# Altium PCB lab2_sokolov_boost.PcbDoc
Units mm, origin at the board's own origin, x right, y up, seen from the top; angles counter-clockwise.
Board outline 38 x 23 mm, 2 copper layers (Top Layer, Bottom Layer), stack 1.57 mm thick; 20 components, 13 nets, 67 pads, 56 vias.
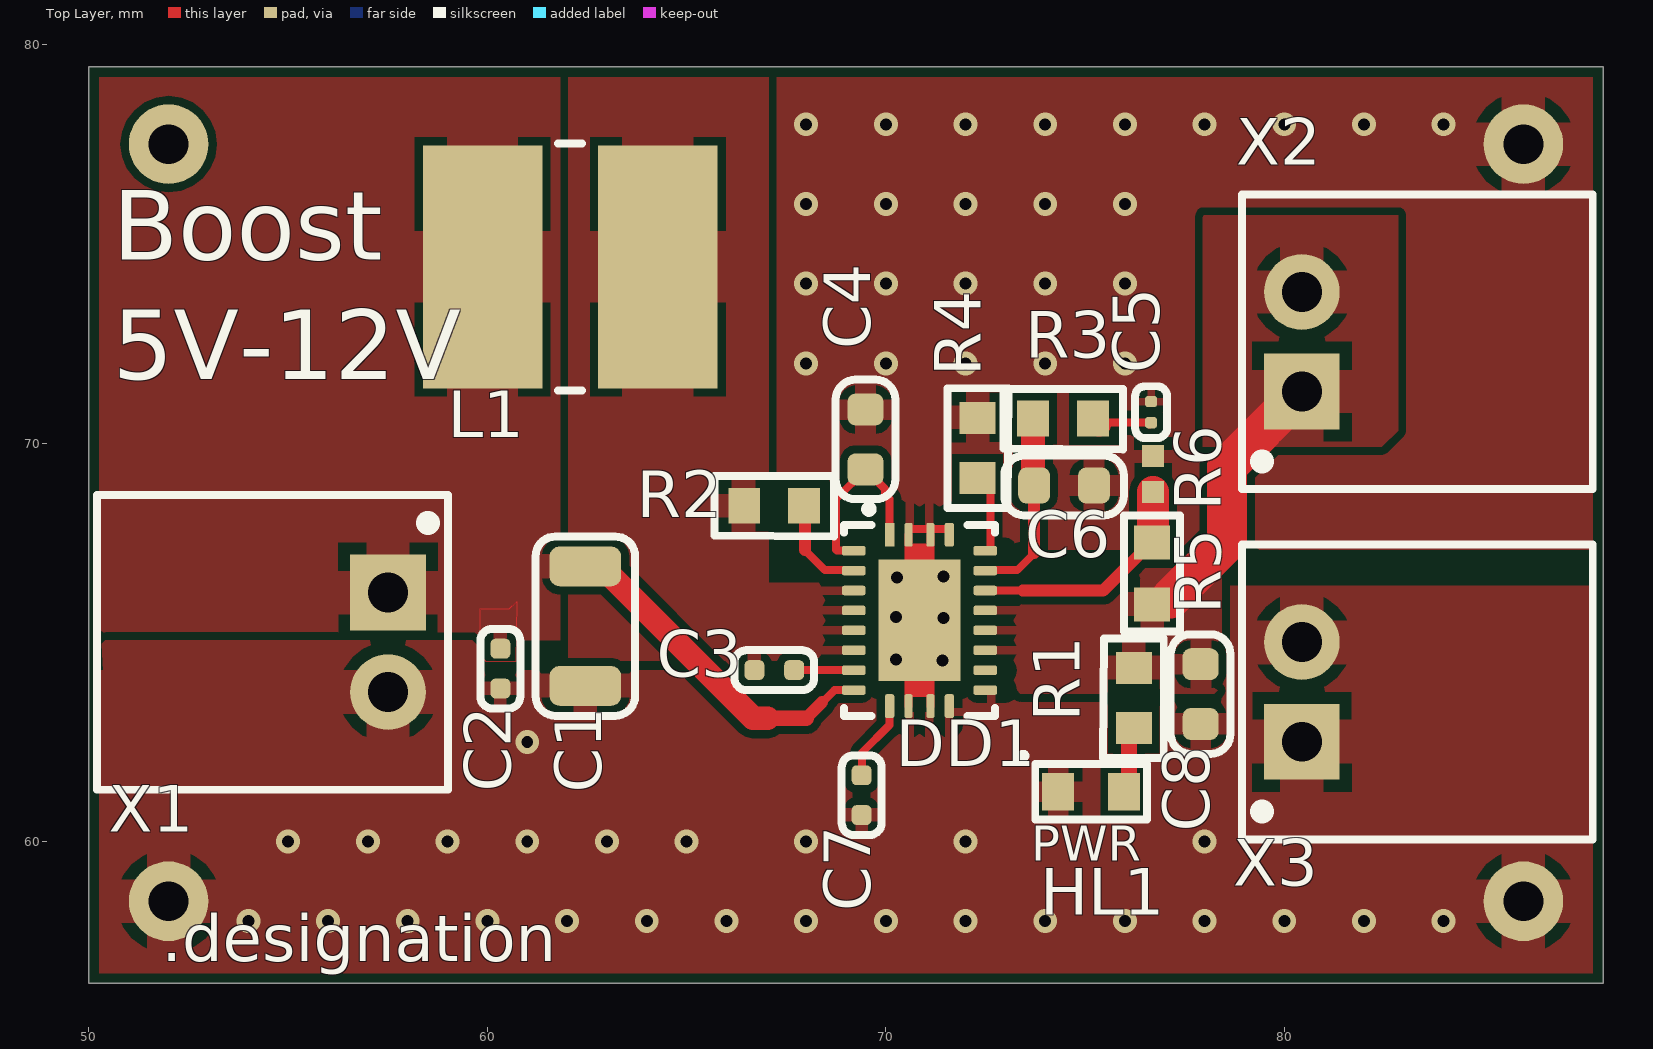
[diagram p0: Top Layer view]
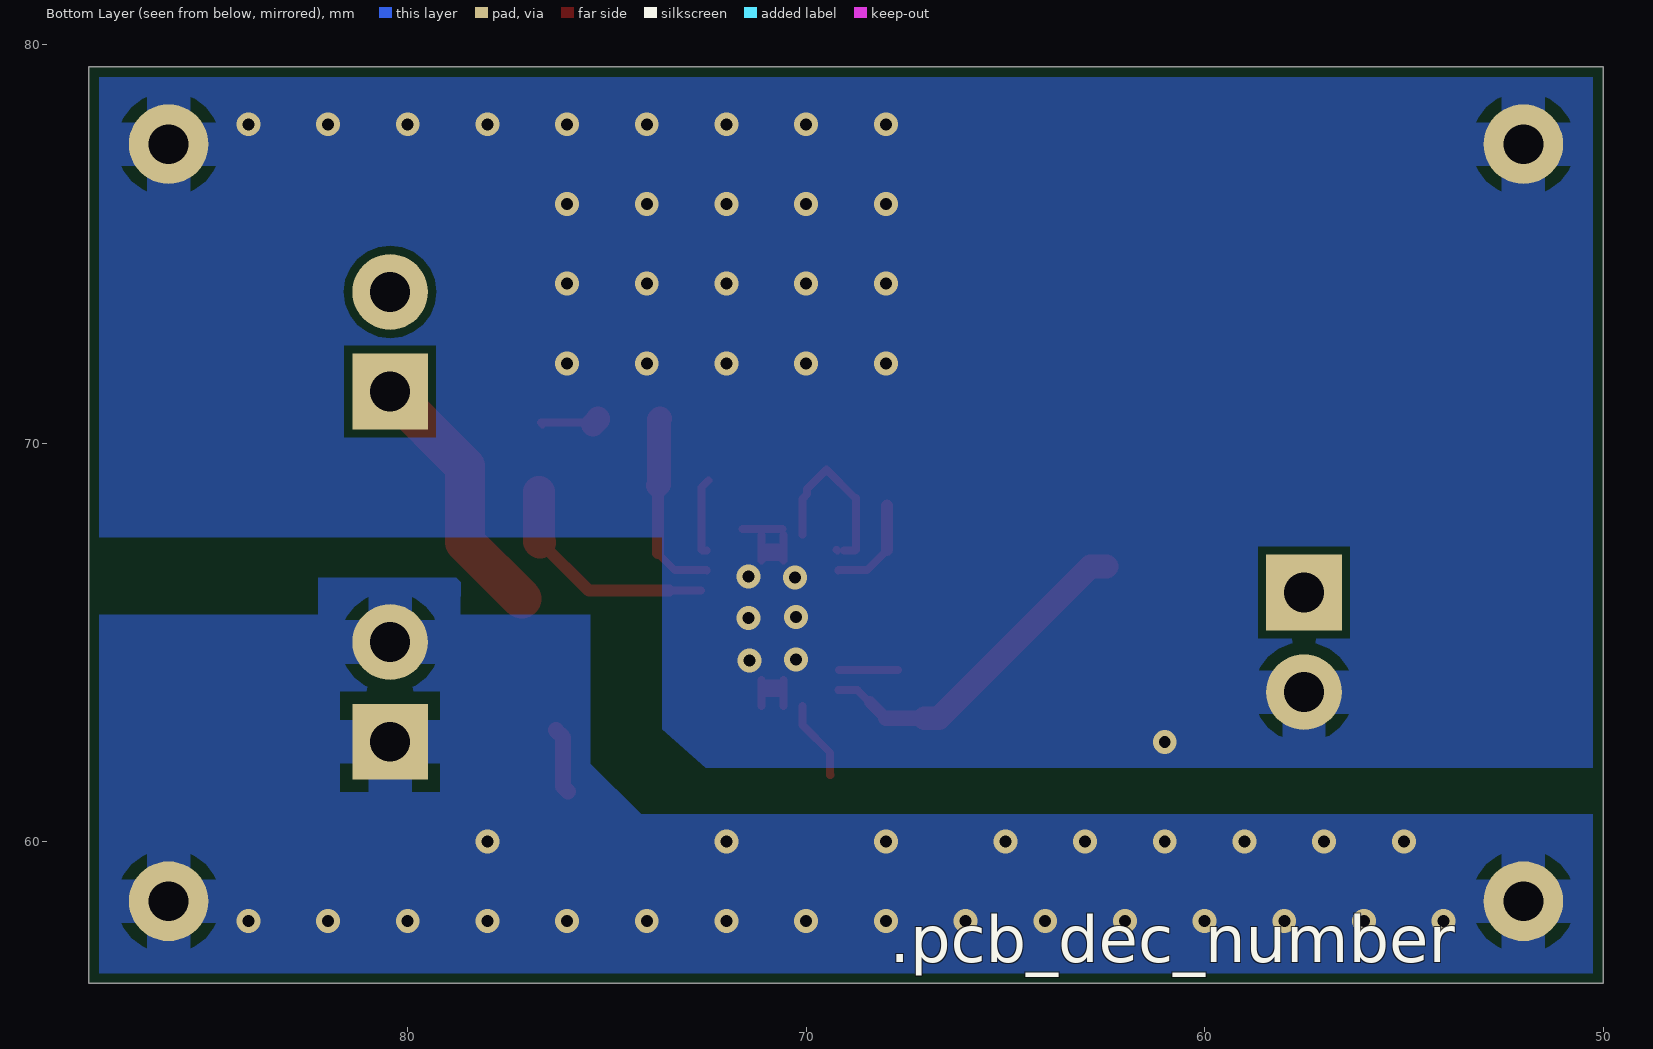
[diagram p1: Bottom Layer view, seen from below]
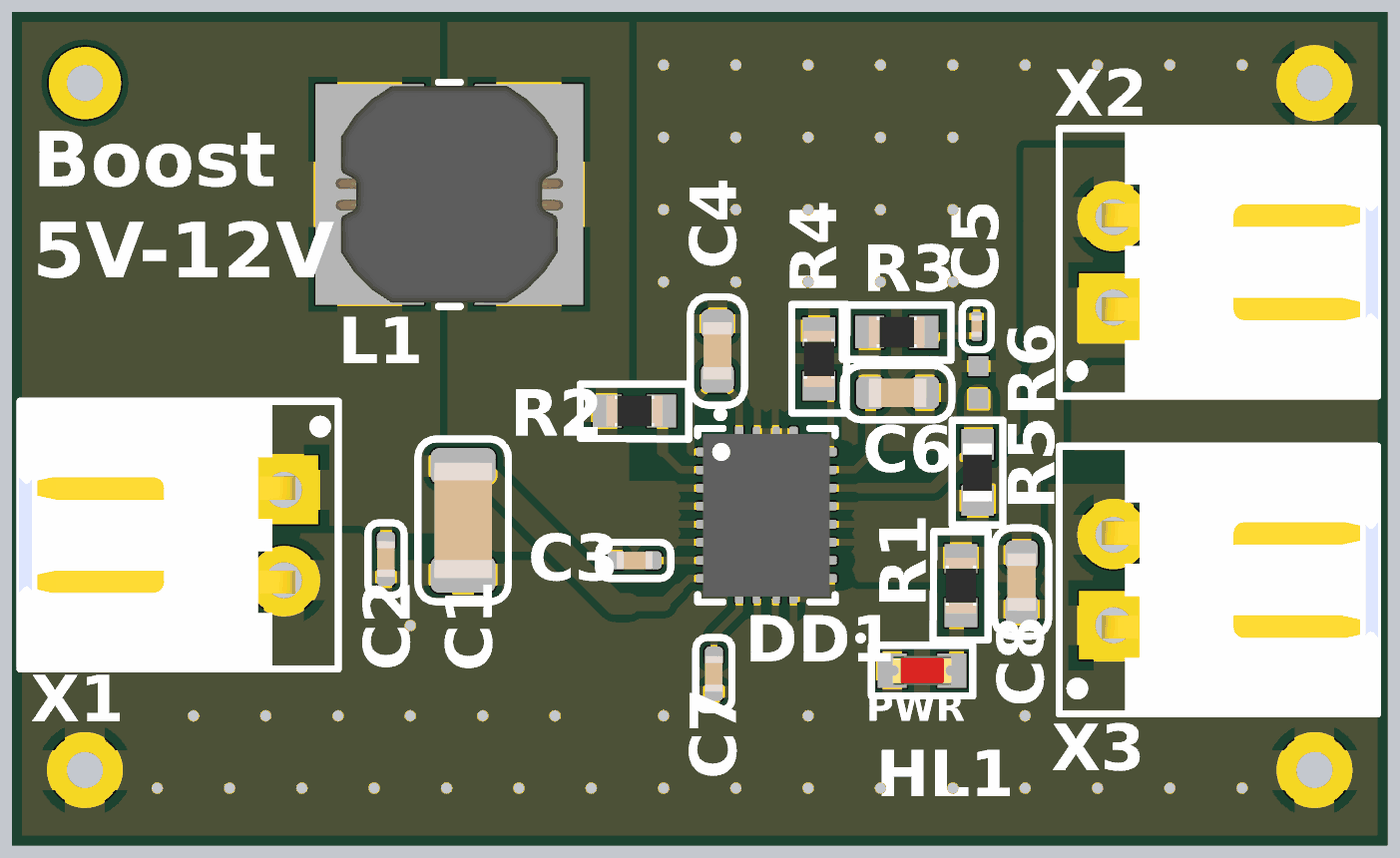
[diagram p2: 3D render of the assembled board from above, using the file's embedded part models]

## Layer stack, top to bottom
Top Solder: solder mask 0.0102, Solder Resist, Dk 3.5
Top Layer: signal copper 0.035
Core 1: core 1.5, FR4, Dk 4.6
Bottom Layer: signal copper 0.035
Bottom Solder: solder mask 0.0102, Solder Resist, Dk 3.5

## Board outline
50,56.439 88,56.439 88,79.439 50,79.439

## Design rules (kind name [scope] priority, off if disabled: settings)
AcuteAngle min_acute_angle [OnCopper] p1: minimum=3.50000000000000E+0001 checktracksonly=FALSE // Минимальный угол между примитивами топологии
BoardOutlineClearance board_outline_clearance_std [NOT (OnLayer('Bottom Overlay') OR OnLayer('Top Overlay'))] p1: gap=0.25 ignorepadtopadclearanceinfootprint=FALSE except(0: Arc-SplitContinuation Track-SplitContinuation SMDPad-SplitContinuation THPad-SplitContinuation Via-SplitContinuation Fill-SplitContinuation Poly-SplitContinuation Region-SplitContinuation Text-SplitContinuation) // Отступ элементов топологии от края фрезеруемой печатной платы
Clearance clearance_outer_35um_std [OnTopLayer OR OnBottomLayer] p1: gap=0.2 ignorepadtopadclearanceinfootprint=TRUE except(0.25: Arc-Hole Track-Hole SMDPad-Hole THPad-Hole Via-Hole Fill-Hole Poly-Hole Region-Hole Text-Hole) // Зазоры на внешних слоях
Clearance clearance_inner_35um_std [NOT (OnTopLayer Or OnBottomLayer)] p2: gap=0.2 ignorepadtopadclearanceinfootprint=FALSE except(0.25: Arc-Hole Track-Hole SMDPad-Hole THPad-Hole Via-Hole Fill-Hole Poly-Hole Region-Hole Text-Hole) // Зазоры на внутренних слоях
ComponentClearance [All] p1: gap=0 collisioncheckmode=3 verticalgap=0 showdistances=FALSE
DiffPairsRouting diff_pairs_routing [All] p1: maxlimit=0.127 minlimit=0.127 mostfreqgap=0.127 toplayer_minwidth=0.143 toplayer_maxwidth=0.143 toplayer_prefwidth=0.143 bottomlayer_minwidth=0.143 bottomlayer_maxwidth=0.143 bottomlayer_prefwidth=0.143 impedanceprofiledriven=TRUE impedanceprofileid={FD46899E-B5A2-4EF5-A302-5D2DB6A51F35} maxuncoupledlength=12.7 // Правила трассировки дифференциальных пар
HoleSize min_hole_size_std [IsPad] p1: absolutevalues=TRUE maxlimit=5.9 minlimit=0.6 maxpercent=80.000 minpercent=20.000 // Диаметр межслойного переходного отверстия
HoleSize min_hole_size_via_std [IsVia] p2: absolutevalues=TRUE maxlimit=5.9 minlimit=0.3 maxpercent=80.000 minpercent=20.000 // Минимальный диаметр монтажного отверстия
HoleToHoleClearance hole_to_hole_clearance_std [All] p1: gap=0.2 allowstackedmicrovias=FALSE // Минимальное расстояние между краями двух отверстий
MinimumAnnularRing min_via_ar_std [All] p1: minimumring=0.15 // Поясок площадки переходного отверстия (Annular ring VIA)
MinimumAnnularRing min_pad_ar_std [All] p2: minimumring=0.2 // Поясок монтажной контактной площадки (Annular ring PAD)
MinimumSolderMaskSliver min_solder_mask_bridge_std [All] p1: minsoldermaskwidth=0.15 // Мнимальная ширина масочного мостика
PlaneClearance plane_clearance_35um_std [All] p1: clearance=0.2 // Отступ полигона (для слоя plane) от элементов топологии
PlaneConnect [All] p1: planeconnectstyle=Relief reliefexpansion=0.5 reliefentries=4 reliefconductorwidth=0.2 reliefairgap=0.2
PolygonConnect poly_connect_to_pad<=0.3 [(AsMM(PadXSize_AllLayers)<=0.301) or (AsMM(PadYSize_AllLayers)<=0.301)] p1: thpad.connectstyle=Relief thpad.reliefconductorwidth=0.2 thpad.reliefentries=4 thpad.polygonreliefangle="90 Angle" thpad.airgapwidth=0.2 smdpad.connectstyle=Relief smdpad.reliefconductorwidth=0.2 smdpad.reliefentries=4 smdpad.polygonreliefangle="90 Angle" smdpad.airgapwidth=0.2 via.connectstyle=Direct via.reliefconductorwidth=0.254 via.reliefentries=4 via.polygonreliefangle="90 Angle" via.airgapwidth=0.254 // Правила подключения полигонов для падов от 0,3мм и меньше
PolygonConnect poly_connect_to_pad<=0.4 [(AsMM(PadXSize_AllLayers)<=0.401) or (AsMM(PadYSize_AllLayers)<=0.401)] p2: thpad.connectstyle=Relief thpad.reliefconductorwidth=0.26 thpad.reliefentries=4 thpad.polygonreliefangle="90 Angle" thpad.airgapwidth=0.2 smdpad.connectstyle=Relief smdpad.reliefconductorwidth=0.26 smdpad.reliefentries=4 smdpad.polygonreliefangle="90 Angle" smdpad.airgapwidth=0.2 via.connectstyle=Direct via.reliefconductorwidth=0.254 via.reliefentries=4 via.polygonreliefangle="90 Angle" via.airgapwidth=0.254 // Правила подключения полигонов для падов от 0,4 и меньше
PolygonConnect poly_connect_to_pad<=0.6 [(AsMM(PadXSize_AllLayers)<=0.601) or (AsMM(PadYSize_AllLayers)<=0.601)] p3: thpad.connectstyle=Relief thpad.reliefconductorwidth=0.33 thpad.reliefentries=4 thpad.polygonreliefangle="90 Angle" thpad.airgapwidth=0.2 smdpad.connectstyle=Relief smdpad.reliefconductorwidth=0.33 smdpad.reliefentries=4 smdpad.polygonreliefangle="90 Angle" smdpad.airgapwidth=0.2 via.connectstyle=Direct via.reliefconductorwidth=0.254 via.reliefentries=4 via.polygonreliefangle="90 Angle" via.airgapwidth=0.254 // Правила подключения полигонов для падов от 0,6мм и меньше
PolygonConnect poly_connect_to_pad<=0.7 [(AsMM(PadXSize_AllLayers)<=0.701) or (AsMM(PadYSize_AllLayers)<=0.701)] p4: thpad.connectstyle=Relief thpad.reliefconductorwidth=0.46 thpad.reliefentries=4 thpad.polygonreliefangle="90 Angle" thpad.airgapwidth=0.2 smdpad.connectstyle=Relief smdpad.reliefconductorwidth=0.46 smdpad.reliefentries=4 smdpad.polygonreliefangle="90 Angle" smdpad.airgapwidth=0.2 via.connectstyle=Direct via.reliefconductorwidth=0.254 via.reliefentries=4 via.polygonreliefangle="90 Angle" via.airgapwidth=0.254 // Правила подключения полигонов для падов от 0,7мм и меньше
PolygonConnect poly_connect_to_pad<=0.8 [(AsMM(PadXSize_AllLayers)<=0.8)or(AsMM(PadYSize_AllLayers)<=0.8)] p5: thpad.connectstyle=Relief thpad.reliefconductorwidth=0.53 thpad.reliefentries=4 thpad.polygonreliefangle="90 Angle" thpad.airgapwidth=0.3 smdpad.connectstyle=Relief smdpad.reliefconductorwidth=0.53 smdpad.reliefentries=4 smdpad.polygonreliefangle="90 Angle" smdpad.airgapwidth=0.2 via.connectstyle=Direct via.reliefconductorwidth=0.254 via.reliefentries=4 via.polygonreliefangle="90 Angle" via.airgapwidth=0.254 // Правила подключения полигонов для падов от 0,8мм и меньше
PolygonConnect poly_connect_to_pad<=1 [(AsMM(PadXSize_AllLayers)<=1.01)or(AsMM(PadYSize_AllLayers)<=1.01)] p6: thpad.connectstyle=Relief thpad.reliefconductorwidth=0.6 thpad.reliefentries=4 thpad.polygonreliefangle="90 Angle" thpad.airgapwidth=0.3 smdpad.connectstyle=Relief smdpad.reliefconductorwidth=0.6 smdpad.reliefentries=4 smdpad.polygonreliefangle="90 Angle" smdpad.airgapwidth=0.2 via.connectstyle=Direct via.reliefconductorwidth=0.254 via.reliefentries=4 via.polygonreliefangle="90 Angle" via.airgapwidth=0.254 // Правила подключения полигонов для падов от 1мм и меньше
PolygonConnect poly_connect_to_pad<=1.3 [(AsMM(PadXSize_AllLayers)<=1.31)or(AsMM(PadYSize_AllLayers)<=1.31)] p7: thpad.connectstyle=Relief thpad.reliefconductorwidth=0.66 thpad.reliefentries=4 thpad.polygonreliefangle="90 Angle" thpad.airgapwidth=0.3 smdpad.connectstyle=Relief smdpad.reliefconductorwidth=0.86 smdpad.reliefentries=4 smdpad.polygonreliefangle="90 Angle" smdpad.airgapwidth=0.2 via.connectstyle=Direct via.reliefconductorwidth=0.254 via.reliefentries=4 via.polygonreliefangle="90 Angle" via.airgapwidth=0.254 // Правила подключения полигонов для падов от 1,3мм и меньше
PolygonConnect poly_connect_to_pad<=1.6 [(AsMM(PadXSize_AllLayers)<=1.61)or(AsMM(PadYSize_AllLayers)<=1.61)] p8: thpad.connectstyle=Relief thpad.reliefconductorwidth=0.8 thpad.reliefentries=4 thpad.polygonreliefangle="90 Angle" thpad.airgapwidth=0.3 smdpad.connectstyle=Relief smdpad.reliefconductorwidth=1 smdpad.reliefentries=4 smdpad.polygonreliefangle="90 Angle" smdpad.airgapwidth=0.2 via.connectstyle=Direct via.reliefconductorwidth=0.254 via.reliefentries=4 via.polygonreliefangle="90 Angle" via.airgapwidth=0.254 // Правила подключения полигонов для падов от 1,6мм и меньше
PolygonConnect poly_connect_to_pad<=1.8 [(AsMM(PadXSize_AllLayers)<=1.8)or(AsMM(PadYSize_AllLayers)<=1.8)] p9: thpad.connectstyle=Relief thpad.reliefconductorwidth=1 thpad.reliefentries=4 thpad.polygonreliefangle="90 Angle" thpad.airgapwidth=0.3 smdpad.connectstyle=Relief smdpad.reliefconductorwidth=1.2 smdpad.reliefentries=4 smdpad.polygonreliefangle="90 Angle" smdpad.airgapwidth=0.2 via.connectstyle=Direct via.reliefconductorwidth=0.254 via.reliefentries=4 via.polygonreliefangle="90 Angle" via.airgapwidth=0.254 // Правила подключения полигонов для падов от 1,8мм и меньше
PolygonConnect poly_connect_to_pad<=2 [(AsMM(PadXSize_AllLayers)<=2.01)or(AsMM(PadYSize_AllLayers)<=2.01)] p10: thpad.connectstyle=Relief thpad.reliefconductorwidth=1.1 thpad.reliefentries=4 thpad.polygonreliefangle="90 Angle" thpad.airgapwidth=0.3 smdpad.connectstyle=Relief smdpad.reliefconductorwidth=1.4 smdpad.reliefentries=4 smdpad.polygonreliefangle="90 Angle" smdpad.airgapwidth=0.2 via.connectstyle=Direct via.reliefconductorwidth=0.254 via.reliefentries=4 via.polygonreliefangle="90 Angle" via.airgapwidth=0.254 // Правила подключения полигонов для падов от 2мм и меньше
PolygonConnect poly_connect_to_pad<=2.3 [(AsMM(PadXSize_AllLayers)<=2.31)or(AsMM(PadYSize_AllLayers)<=2.31)] p11: thpad.connectstyle=Relief thpad.reliefconductorwidth=1.2 thpad.reliefentries=4 thpad.polygonreliefangle="90 Angle" thpad.airgapwidth=0.3 smdpad.connectstyle=Relief smdpad.reliefconductorwidth=1.4 smdpad.reliefentries=4 smdpad.polygonreliefangle="90 Angle" smdpad.airgapwidth=0.2 via.connectstyle=Direct via.reliefconductorwidth=0.254 via.reliefentries=4 via.polygonreliefangle="90 Angle" via.airgapwidth=0.254 // Правила подключения полигонов для падов от 2,3мм и меньше
PolygonConnect poly_connect_to_pad<=2.5 [(AsMM(PadXSize_AllLayers)<=2.51)or(AsMM(PadYSize_AllLayers)<=2.51)] p12: thpad.connectstyle=Relief thpad.reliefconductorwidth=1.2 thpad.reliefentries=4 thpad.polygonreliefangle="90 Angle" thpad.airgapwidth=0.3 smdpad.connectstyle=Relief smdpad.reliefconductorwidth=1.4 smdpad.reliefentries=4 smdpad.polygonreliefangle="90 Angle" smdpad.airgapwidth=0.2 via.connectstyle=Direct via.reliefconductorwidth=0.254 via.reliefentries=4 via.polygonreliefangle="90 Angle" via.airgapwidth=0.254 // Правила подключения полигонов для падов от 2,5мм и меньше
PolygonConnect poly_connect_to_pad<=2.7 [(AsMM(PadXSize_AllLayers)<=2.71)or(AsMM(PadYSize_AllLayers)<=2.71)] p13: thpad.connectstyle=Relief thpad.reliefconductorwidth=1.4 thpad.reliefentries=4 thpad.polygonreliefangle="90 Angle" thpad.airgapwidth=0.3 smdpad.connectstyle=Relief smdpad.reliefconductorwidth=1.6 smdpad.reliefentries=4 smdpad.polygonreliefangle="90 Angle" smdpad.airgapwidth=0.2 via.connectstyle=Direct via.reliefconductorwidth=0.254 via.reliefentries=4 via.polygonreliefangle="90 Angle" via.airgapwidth=0.254 // Правила подключения полигонов для падов от 2,7мм и меньше
PolygonConnect poly_connect_to_pad<=3 [(AsMM(PadXSize_AllLayers)<=3.01)or(AsMM(PadYSize_AllLayers)<=3.01)] p14: thpad.connectstyle=Relief thpad.reliefconductorwidth=1.6 thpad.reliefentries=4 thpad.polygonreliefangle="90 Angle" thpad.airgapwidth=0.3 smdpad.connectstyle=Relief smdpad.reliefconductorwidth=1.8 smdpad.reliefentries=4 smdpad.polygonreliefangle="90 Angle" smdpad.airgapwidth=0.2 via.connectstyle=Direct via.reliefconductorwidth=0.254 via.reliefentries=4 via.polygonreliefangle="90 Angle" via.airgapwidth=0.254 // Правила подключения полигонов для падов от 3мм и меньше
PolygonConnect poly_connect_to_pad<=7 [(AsMM(PadXSize_AllLayers)<7.01)or(AsMM(PadYSize_AllLayers)<=7.01)] p15: thpad.connectstyle=Relief thpad.reliefconductorwidth=2 thpad.reliefentries=4 thpad.polygonreliefangle="90 Angle" thpad.airgapwidth=0.4 smdpad.connectstyle=Relief smdpad.reliefconductorwidth=2 smdpad.reliefentries=4 smdpad.polygonreliefangle="90 Angle" smdpad.airgapwidth=0.3 via.connectstyle=Direct via.reliefconductorwidth=0.254 via.reliefentries=4 via.polygonreliefangle="90 Angle" via.airgapwidth=0.254 // Правила подключения полигонов для падов от 7мм и меньше
PolygonConnect poly_connect_to_pad [All] p16: thpad.connectstyle=Relief thpad.reliefconductorwidth=0.25 thpad.reliefentries=4 thpad.polygonreliefangle="90 Angle" thpad.airgapwidth=0.2 smdpad.connectstyle=Relief smdpad.reliefconductorwidth=0.25 smdpad.reliefentries=4 smdpad.polygonreliefangle="90 Angle" smdpad.airgapwidth=0.2 via.connectstyle=Direct via.reliefconductorwidth=0.25 via.reliefentries=4 via.polygonreliefangle="90 Angle" via.airgapwidth=0.2 // Правила подключения полигонов общие
RoutingCorners [All] p1 off: cornerstyle=45-Degree minsetback=2.5 maxsetback=2.5
RoutingVias [All] p1: holewidth=0.3 width=0.6 viastyle="Through Hole" minholewidth=0.3 minwidth=0.6 maxholewidth=5.9 maxwidth=6.4
SilkToSilkClearance silk_to_silk_clearance_std [All] p1 off: silktosilkclearance=0.15 // Отступ текста шелкографии от других примитивов шелкографии
SilkToSolderMaskClearance silk_to_solder_mask_clearance_std [IsPad] p1 off: minsilkscreentomaskgap=0.15 clearancetoexposedcopper=FALSE // Минимальное расстояние между элементами шелкографии и вскрытой медью
SolderMaskExpansion solder_mask_expansion_std [All] p1: expansion=0.05 // Припуск паяльной масски
UnRoutedNet [All] p1: checkbadconnections=TRUE
Width width_35um_std [All] p1: maxlimit=10 minlimit=0.2 preferedwidth=0.2 checkconnectedcopper=TRUE // Ширина проводников (общая)
19 further rules are at their usual default settings.

## Components (designator, comment, footprint, x,y, rotation, side; value= is the part's Value field where it differs from the comment)
C1 "22 мк" C1206 62.459,65.405 r90 top
C2 "0,1 мк" C0402 60.325,64.338 r90 top
C3 "0,1 мк" C0402 67.2,64.3 r0 top
C4 "2,2 мк" C0603 69.49,70.09 r270 top
C5 "1000" C0201 76.657,70.775 r270 top
C6 "82" C0603 74.473,68.936 r0 top
C7 "8200" C0402 69.393,61.163 r90 top
C8 "10 мк" C0603 77.9,63.7 r90 top
DD1 "TPS61088RHLT" VQFN-20 70.845,65.548 r0 top
HL1 "TLMY1000-GS08" HL0603 75.15,61.25 r0 top
L1 "SRN6045-4R7Y" SRN-2-600X600X450 62.078,74.422 r0 top
R1 "750" R0603#1 76.225,63.6 r270 top
R2 "255 к" R0603#1 67.195,68.428 r0 top
R3 "10 к" R0603#1 74.447,70.612 r0 top
R4 "100 к" R0603#1 72.3,69.875 r90 top
R5 "825 к" R0603#2 76.683,66.726 r90 top
R6 "92 к" R0402 76.708,69.222 r90 top
X1 "" DS1029-2-MRW6XB 54.356,64.999 r270 top
X2 "DS1029-2-MRW6XB" DS1029-2-MRW6XB 83.591,72.542 r90 top
X3 "DS1029-2-MRW6XB" DS1029-2-MRW6XB 83.591,63.754 r90 top

## Footprints (in the part's own frame and the unit in brackets; to place one, negate y for a bottom-side part, rotate by r counter-clockwise, add the part's x,y. Pads: shape width x height; smd on the part's side, far side on the other; paste and mask are expansions set on the pad)
C0201 [mm] "Chip Capacitor, 2-Leads, Body 0,60x0,30mm, IPC Medium Density"
  rrect50% 0.28x0.3 smd: 1(-0.265,0) 2(0.265,0)
  silkscreen extent -0.65,-0.4 0.65,0.4, body extent -0.3,-0.15 0.3,0.15, height 0.29
C0402 [mm] "Chip Capacitor, 2-Leads, Body 1,00x0,50mm, IPC Medium Density"
  rrect50% 0.5x0.5 smd: 1(-0.5,0) 2(0.5,0)
  silkscreen extent -1,-0.5 1,0.5, body extent -0.5,-0.25 0.5,0.25, height 0.5
C0603 [mm] "Chip Capacitor, 2-Leads, Body 1,60x0,80mm, IPC Medium Density"
  rrect50% 0.8x0.9 smd: 1(-0.75,0) 2(0.75,0)
  silkscreen extent -1.5,-0.75 1.5,0.75, body extent -0.8,-0.4 0.8,0.4, height 0.8
C1206 [mm] "Chip Capacitor, 2-Leads, Body 3,20x1,60mm, IPC Medium Density"
  rrect50% 1x1.8 smd: 1(-1.5,0) 2(1.5,0)
  silkscreen extent -2.25,-1.25 2.25,1.25, body extent -1.6,-0.8 1.6,0.8, height 0.78
DS1029-2-MRW6XB [mm]
  rect 1.9x1.9 hole 1: 1(-1.25,3.15)
  round 1.9 hole 1: 2(1.25,3.15)
  silkscreen extent -3.7,-4.15 3.7,4.65, body extent -3.7,-4.17 3.7,3.47, height 5.75
HL0603 [mm] "Chip Diode, 2-Leads, Body 1,60x0,80mm, IPC Medium Density"
  rect 0.8x0.95 smd: 1(-0.825,0) 2(0.825,0)
  silkscreen extent -1.75,-0.7 1.4,0.95, body extent -0.81,-0.4 0.81,0.4, height 0.6
R0402 [mm]
  rect 0.55x0.55 smd: 1(-0.45,0) 2(0.45,0)
  body extent -0.53,-0.27 0.53,0.28, height 0.4
R0603#1 [mm] "Chip Resistor, 2-Leads, Body 1,60x0,80mm, IPC Medium Density"
  rect 0.8x0.9 smd: 1(-0.75,0) 2(0.75,0)
  silkscreen extent -1.5,-0.77 1.5,0.75, body extent -0.77,-0.43 0.78,0.43, height 0.43
R0603#2 [mm] "Chip Resistor, 2-Leads, Body 1,60x0,80mm, IPC Medium Density"
  rect 0.85x0.9 smd: 1(-0.775,0) 2(0.775,0)
  silkscreen extent -1.45,-0.7 1.45,0.7, body extent -0.8,-0.4 0.8,0.4, height 0.45
SRN-2-600X600X450 [mm] "Precision Wire Wound Inductor, 2-Leads, Body 6,00x6,00mm, IPC Medium Density"
  rect 3x6.1 smd: 1(-2.2,0) 2(2.2,0)
  silkscreen extent -0.3,-3.1 0.3,3.1, body extent -3.15,-3 3.15,3, height 4.5
VQFN-20 [mm]
  rect 0.24x0.6 smd: 1(-0.75,2.15)
  rrect50% 0.6x0.24 smd: 2(-1.65,1.75) 3(-1.65,1.25) 4(-1.65,0.75) 5(-1.65,0.25) 6(-1.65,-0.25) 7(-1.65,-0.75) 8(-1.65,-1.25) 9(-1.65,-1.75) 12(1.65,-1.75) 13(1.65,-1.25) 14(1.65,-0.75) 15(1.65,-0.25) 16(1.65,0.25) 17(1.65,0.75) 18(1.65,1.25) 19(1.65,1.75)
  rrect50% 0.24x0.6 smd: 10(-0.75,-2.15) 11(0.75,-2.15) 20(0.75,2.15)
  rrect50% 0.2x0.6 smd: 21(-0.275,-2.15) 21(-0.275,2.15) 21(0.275,-2.15) 21(0.275,2.15)
  rect 2.05x3.05 smd: 21(0,0)
  Top Layer lines w0.2: -0.275,-2.15 -0.275,-1.5 ; -0.275,1.5 -0.275,2.15 ; 0.275,-2.15 0.275,-1.5 ; 0.275,1.5 0.275,2.15
  Top Layer lines w0.25: -0.25,-1.8 0.25,-1.8 ; -0.25,-1.613 0.25,-1.613 ; -0.25,1.613 0.25,1.613 ; -0.25,1.8 0.25,1.8
  silkscreen extent -1.9,-2.4 1.9,2.86, body extent -1.75,-2.25 1.75,2.25, height 0.97

## Part data
C1: library part c0103, "=Описание", HelpURL=https://www.yageo.com/upload/media/product/productsearch/datasheet/mlcc/UPY-GPHC_X7R_6.3V-to-50V_20.pdf, ID=c0103, Корпус=1206, Наименование=CC1206KRX7R7BB226, Напряжение="16 В", Номинал="22 мк", Номинальное напряжение="16 В", Описание="Конденсатор чип 0805 22 мкФ 16 В ±10 %", Отклонение="±10 %", Производитель="YAGEO Corp.", Рабочие температуры="от –55 °С до +125 °С", Температурный коэффициент емкости=X7R, Фамилия=Паньков
C2 C3: library part c0028, "=Описание", HelpURL=https://www.yageo.com/upload/media/product/productsearch/datasheet/mlcc/UPY-GPHC_X5R_4V-to-50V_26.pdf, ID=c0028, Корпус=0402, Наименование=CC0402KRX5R7BB104, Напряжение="16 В", Номинал="0,1 мк", Номинальное напряжение="16 В", Описание="Конденсатор чип 0402 100 нФ 16 В ±10 %", Отклонение="±10 %", Производитель="YAGEO Corp.", Рабочие температуры="от –55 °С до +85 °С", Температурный коэффициент емкости=X5R, Фамилия=Паньков
C4: library part c0069, "=Описание", HelpURL=https://www.yageo.com/upload/media/product/productsearch/datasheet/mlcc/UPY-GPHC_X5R_4V-to-50V_26.pdf, ID=c0069, Корпус=0603, Наименование=CC0603KRX5R7BB225, Напряжение="16 В", Номинал="2,2 мк", Номинальное напряжение="16 В", Описание="Конденсатор чип 0603 2,2 мкФ 16 В ±10 %", Отклонение="±10 %", Производитель="YAGEO Corp.", Рабочие температуры="от –55 °С до +85 °С", Температурный коэффициент емкости=X5R, Фамилия=Паньков
C5: library part c0119, "=Описание", HelpURL=https://datasheet.octopart.com/GRM033R71C102KA01D-Murata-datasheet-14399077.pdf, ID=c0119, Корпус=0201, Наименование=GRM033R71C102KA01D, Напряжение="16 В", Номинал=1000, Номинальное напряжение="16 В", Описание="Конденсатор чип 0201 1000 пФ 16 В ±10 %", Отклонение="±10 %", Производитель="Murata Electronics", Рабочие температуры="от –55 °С до +125 °С", Температурный коэффициент емкости=X7R, Фамилия=Соколов
C6: library part c0011, "=Описание", HelpURL=https://www.yageo.com/upload/media/product/productsearch/datasheet/mlcc/UPY-GP_NP0_16V-to-50V_18.pdf, ID=c0011, Корпус=0603, Наименование=CC0603JRNPO7BN820, Напряжение="16 В", Номинал=82, Номинальное напряжение="16 В", Описание="Конденсатор чип 0603 82 пФ 16 В ±5 %", Отклонение="±5 %", Производитель="YAGEO Corp.", Рабочие температуры="от –55 °С до +125 °С", Температурный коэффициент емкости=C0G, Фамилия=Ларионов
C7: library part c0120, "=Описание", HelpURL=https://ru.mouser.com/datasheet/2/281/murata_03052018_GRM_Series_1-1310166.pdf, ID=c0120, Корпус=0402, Наименование=GRM155R71C822KA01D, Напряжение="16 В", Номинал=8200, Номинальное напряжение="16 В", Описание="Конденсатор чип 0402 8,2 нФ 50 В ±5 %", Отклонение="±5 %", Производитель="Murata Electronics", Рабочие температуры="от –55 °С до +125 °С", Температурный коэффициент емкости=C0G, Фамилия=Соколов
C8: library part c0090, "=Описание", HelpURL=https://www.yageo.com/upload/media/product/productsearch/datasheet/mlcc/UPY-GPHC_X5R_4V-to-50V_26.pdf, ID=c0090, Корпус=0603, Наименование=CC0603KRX5R8BB106, Напряжение="25 В", Номинал="10 мк", Номинальное напряжение="25 В", Описание="Конденсатор чип 0603 10 мкФ 25 В ±10 %", Отклонение="±10 %", Производитель="YAGEO Corp.", Рабочие температуры="от –55 °С до +85 °С", Температурный коэффициент емкости=X5R, Фамилия=Паньков
DD1: library part dd0017, "=Описание", HelpURL=https://www.ti.com/product/TPS61088, ID=dd0017, Входное напряжение="от 2,7 В до 12 В", Выходное напряжение="от 4,5 В до 12,6 В", Коммутируемый ток="до 11,9 А", Корпус=VQFN-20, Наименование=TPS61088RHLT, Описание="Повышающий преобразователь напряжения 12,6 В и 11,9 А", Производитель="Texas Instruments", Рабочие температуры="от -40 °С до +85 °С", Фамилия=Соколов, Частота переключения="от 200 кГц до 2,2 МГц"
HL1: library part hl0003, "=Описание", HelpURL=https://www.vishay.com/leds/list/product-83172/, ID=hl0003, Корпус=0603, Наименование=TLMY1000-GS08, Номинальная длина волны="588 нм", Номинальная сила света="7,5 мкд", Номинальное падение напряжения="1,8 В", Номинальный прямой ток="15 мА", Описание="Светодиод чип 0603 желтый", Производитель="Vishay Intertechnology, Inc.", Рабочие температуры="от -40 °С до +100 °С", Рассеиваемая мощность="40 мВт", Фамилия=Ларионов, Цвет=Yellow
L1: library part l0006, "=Описание", HelpURL=https://www.bourns.com/products/magnetic-products/power-inductors-smd-semi-shielded/product/SRN6045, ID=l0006, Индуктивность="4,7 мкГн", Корпус="6,0 x 6,0 x 4,5", Максимальное активное сопротивление="37,6 мОм", Наименование=SRN6045-4R7Y, Номинал="4,7 мкГн", Номинальное активное сопротивление="37,6 мОм", Номинальный ток (при нагреве на 20 °С/40 °С)="3 А", Описание="Катушка индуктивности 4,7 мкГн ±30 %", Отклонение="±30 %", Производитель="Bourns, Inc.", Рабочее напряжение="не указано", Рабочие температуры="от –40 °С до +125 °С", Резонансная частота="7,96 МГц", Ток насыщения="3,5 А", Фамилия=Соколов
R1: library part r0028, "=Описание", HelpURL=https://www.yageo.com/upload/media/product/productsearch/datasheet/rchip/PYu-RC_Group_51_RoHS_L_11.pdf, ID=r0028, Корпус=0603, Наименование=RC0603FR-07750RL, Номинал=750, Номинальное напряжение="75 В", Номинальный ток="1 А", Описание="Резистор чип 0603 750 Ом ±1 % 0,1 Вт", Отклонение="±1 %", Производитель="YAGEO Corp.", Рабочие температуры="от –55 °С до +155 °С", Фамилия=Паньков
R2: library part r0109, "=Описание", HelpURL=https://www.yageo.com/upload/media/product/productsearch/datasheet/rchip/PYu-RC_Group_51_RoHS_L_11.pdf, ID=r0109, Корпус=0603, Наименование=RC0603FR-07255KL, Номинал="255 к", Номинальное напряжение="75 В", Номинальный ток="1 А", Описание="Резистор чип 0603 255 кОм ±1 % 0,1 Вт", Отклонение="±1 %", Производитель="YAGEO Corp.", Рабочие температуры="от –55 °С до +155 °С", Фамилия=Ляпцев
R3: library part r0017, "=Описание", HelpURL=https://www.yageo.com/upload/media/product/productsearch/datasheet/rchip/PYu-RC_Group_51_RoHS_L_11.pdf, ID=r0017, Корпус=0603, Наименование=RC0603FR-0710KL, Номинал="10 к", Номинальное напряжение="75 В", Номинальный ток="1 А", Описание="Резистор чип 0603 10 кОм ±1 % 0,1 Вт", Отклонение="±1 %", Производитель="YAGEO Corp.", Рабочие температуры="от -55 °С до +155 °С", Фамилия=Самарин
R4: library part r0094, "=Описание", HelpURL=https://www.yageo.com/upload/media/product/productsearch/datasheet/rchip/PYu-RC_Group_51_RoHS_L_11.pdf, ID=r0094, Корпус=0603, Наименование=RC0603FR-07100KL, Номинал="100 к", Номинальное напряжение="75 В", Номинальный ток="1 А", Описание="Резистор чип 0603 100 кОм ±1 % 0,1 Вт", Отклонение="±1 %", Производитель="YAGEO Corp.", Рабочие температуры="от –55 °С до +155 °С", Фамилия=Водорезов
R5: library part r0134, "=Описание", HelpURL=https://www.yageo.com/upload/media/product/productsearch/datasheet/rchip/PYu-RC_Group_51_RoHS_L_11.pdf, ID=r0134, Корпус=0603, Наименование=RC0603FR-07825KL, Номинал="825 к", Номинальное напряжение="75 В", Номинальный ток="1 А", Описание="Резистор чип 0603 825 кОм ±1 % 0,1 Вт", Отклонение="±1 %", Производитель="YAGEO Corp.", Рабочие температуры="от –55 °С до +155 °С", Фамилия=Соколов
R6: library part r0132, "=Описание", HelpURL=https://ru.mouser.com/datasheet/2/447/PYu-RT_1-to-0.01_RoHS_L_11-1669912.pdf, ID=r0132, Корпус=0402, Наименование=RT0805BRD0792KL, Номинал="92 к", Номинальное напряжение="75 В", Номинальный ток="1 А", Описание="Резистор чип 0402 92 кОм ±1 % 0,1 Вт", Отклонение="±1 %", Производитель=Yageo, Рабочие температуры="от -55 °С до +155 °С", Фамилия=Соколов
X1 X2 X3: library part x0007, "=Описание", HelpURL=http://www.connfly.com/productshow.aspx?id=352, ID=x0007, Наименование=DS1029-2-MRW6XB, Описание="CWF 2 pin Type B 2,5 мм вилка угловой", Производитель="Connfly Electronic Co. LTD.", Фамилия=Ларионов
  X1: Contact_1=VIN, Contact_2=0V
  X2: Contact_1=VOUT, Contact_2=VOUT
  X3: Contact_1=GND, Contact_2=GND

## Free pads (board coordinates)
  round 2 hole 1: 1(52,58.5) 1(52,77.5) 1(86,58.5) 1(86,77.5)

## Via types
v1: diameter 0.6, hole 0.3, Top Layer to Bottom Layer, tented both sides, 50 vias
v2: diameter 0.6, hole 0.3, Top Layer to Bottom Layer, 6 vias

## Nets (pads, with @x,y where several pads share a name; then routed paths per layer and width w, separated by ;. In a path a pad name is that pad's centre, name@x,y a point inside that pad or via, vN(x,y) a via of type N, cw(c..) or ccw(c..) an arc to the next point about the centre after c; other vN are vias at no path point)
AGND: C1.1 C2.1 C4.1 C5.1 C6.2 C7.1 C8.1 DD1.11 DD1.12 DD1.20 DD1.21 HL1.1 pad.1 R4.2 R6.2 X1.2 X3.1 X3.2 | length 1
  Top Layer w0.2: DD1.21@70.595,67.848 DD1.20@71.595,67.848
  other v1: 54,58 56,58 58,58 60,58 62,58 64,58 66,58 68,58 70,58 72,58 74,58 76,58 78,58 80,58 82,58 84,58 55,60 57,60 59,60 61,60 63,60 65,60 68,60 72,60 78,60 61,62.5 68,72 70,72 72,72 74,72 76,72 68,74 70,74 72,74 74,74 76,74 68,76 70,76 72,76 74,76 76,76 68,78 70,78 72,78 74,78 76,78 78,78 80,78 82,78 84,78
  other v2: 71.425,64.541 70.256,64.567 71.45,65.608 70.256,65.634 70.282,66.624 71.45,66.65
BOOT: C3.2 DD1.8 | length 1.5
  Top Layer w0.2: C3.2 DD1.8@69.175,64.299
COMP: C6.1 DD1.18 R3.1 | length 4.8
  Top Layer w0.2: DD1.18 72.504,66.808 73.297,66.808 73.723,67.233
  Top Layer w0.3: 73.723,67.233 C6.1
  Top Layer w0.6: R3.1@73.672,70.612 73.698,70.587 73.698,68.961 C6.1
FB: DD1.17 R5.2 R6.1 | length 5.8
  Top Layer w0.2: DD1.17@72.645,66.298 73.436,66.298
  Top Layer w0.3: 73.436,66.298 75.455,66.298 76.658,67.501 R5.2
  Top Layer w0.8: R5.2 76.708,67.526 R6.1
FSW: DD1.3 R2.2 | length 2.6
  Top Layer w0.2: 67.97,67.31 68.472,66.808 69.185,66.808 DD1.3
  Top Layer w0.3: 67.97,67.31 R2.2@67.97,68.428
ILIM: DD1.19 R4.1 | length 1.9
  Top Layer w0.2: R4.1@72.457,69.057 72.625,68.888 72.625,67.321 72.602,67.298 DD1.19
NetC5_2: C5.2 R3.2 | length 1.7
  Top Layer w0.2: R3.2@75.222,70.612 75.324,70.51 C5.2 C5.2@76.617,70.47
  Top Layer w0.6: R3.2@75.222,70.612 75.222,70.587 R3.2@75.347,70.462
NetHL1_2: HL1.2 R1.2 | length 1.7
  Top Layer w0.4: HL1.2 76.1,61.375 76.1,62.612 R1.2@76.281,62.794
SS: C7.2 DD1.10 | length 2
  Top Layer w0.2: C7.2 69.398,61.668 69.398,62.227 70.095,62.923 DD1.10
SW: C3.1 DD1.4 DD1.5 DD1.6 DD1.7 L1.2 R2.1
VCC: C4.2 DD1.1 DD1.2 | length 4.6
  Top Layer w0.2: DD1.2@69.045,67.298 68.773,67.298 68.75,67.321 68.75,68.615 68.77,68.615 69.49,69.336 69.977,68.849 69.977,68.716 70.095,68.598 70.095,67.848 DD1.1 ; DD1.2@69.217,67.298 DD1.2@69.24,67.321
VIN_NET: C1.2 C2.2 DD1.9 L1.1 X1.1 | length 8.6
  Top Layer w0.2: 68.402,63.5 68.417,63.5 68.715,63.798 DD1.9
  Top Layer w0.3: 67.996,63.094 68.402,63.5
  Top Layer w0.4: 67.031,63.094 67.996,63.094
  Top Layer w0.6: C1.2 62.859,66.905 66.67,63.094 67.031,63.094
VOUT: C8.2 DD1.14 DD1.15 DD1.16 R1.1 R5.1 X2.1 X2.2 | length 6.6
  Top Layer w1: 77.14,66.091 78.566,67.517 78.566,69.417 X2.1
pads on no net: DD1.13

## Polygon pours and split planes (outlines as drawn)
VIN_NET on Top Layer "VIN_POLY" (solid, pour order 68): 60.706,64.516 59.969,64.516 59.817,64.668 59.817,65.837 60.554,65.837 60.731,66.015
VIN_NET on Top Layer "VIN_POLY" (solid, pour order 62): 62.7,80.105 62.7,65.049 50,65.049 50,80
SW on Top Layer "VIN_POLY" (solid, pour order 58): 69.672,66.497 69.672,64.364 66.142,64.364 65.43,65.075 65.43,66.497
AGND on Top Layer "VIN_POLY" (solid, pour order 54): 78.11,66.421 88.265,66.421 88.265,62.89 78.11,62.89
AGND on Top Layer "VIN_POLY" (solid, pour order 48): 88.213,79.438 88.189,67.322 66.777,67.322 66.777,79.54
AGND on Top Layer "VIN_POLY" (solid, pour order 40): 88.199,64.299 49.936,64.299 49.936,56.464 50.089,56.312 88.266,56.312
VOUT on Top Layer "VIN_POLY" (solid, pour order 38): 72.645,66.853 78.435,66.853 78.435,63.779 78.359,63.703 72.645,63.703
SW on Top Layer "VIN_POLY" (solid, pour order 18): 62.027,79.439 62.027,64.541 67.056,64.541 67.056,79.439
VIN_NET on Top Layer "VIN_POLY" (solid, pour order 66): 61.341,65.227
AGND on Top Layer "VIN_POLY" (solid, pour order 56): 50.317,65.049 59.614,65.049 59.792,64.872 59.766,64.846 59.766,62.205 50.47,62.205
VOUT on Top Layer "VIN_POLY" (solid, pour order 36): 82.855,75.717 82.855,70.307 82.448,69.901 77.953,69.901 77.953,75.667 77.902,75.717
FB on Top Layer "VIN_POLY" (solid, pour order 44): 75.336,68.402
VIN_NET on Top Layer "VIN_POLY" (solid, pour order 6): 56.134,71.704
VIN_NET on Top Layer "VIN_POLY" (solid, pour order 4): 56.312,71.958
AGND on Bottom Layer "VIN_POLY" (solid, pour order 74): 78.664,66.599 78.689,66.624 82.245,66.624 82.245,60.782 82.271,60.757 78.765,60.757
AGND on Bottom Layer "VIN_POLY" (solid, pour order 72): 50.216,60.681 74.143,60.681 75.413,61.951 75.413,65.684 88.163,65.684 88.189,65.71 88.265,65.634 88.265,56.566 50.292,56.566 50.165,56.693
AGND on Bottom Layer "VIN_POLY" (solid, pour order 70): 59.461,61.849 59.309,61.849 50,61.849 50,79.439 88.265,79.439 88.265,67.64 73.609,67.64 73.609,62.814 72.517,61.849

## Silkscreen, mask and mechanical layers (free items; w line width, h text height)
Top Overlay:
  text "Boost / 5V-12V" at 50.6,71.025 h3
  text "PWR" at 73.65,59.225 h1.5
  text ".designation" at 51.825,56.6 h2
Bottom Overlay:
  text ".pcb_dec_number" at 67.9,56.575 h2
Board:
  the board outline again, w0.05
Assembly Notes (Mech5):
  text "'.title'" at 39.154,54.46 h2
  text "'.project'_'.pcb_dec_number'['.Pcb_File_Name_No_Path']" at 39.154,51.96 h2